# Altium PCB ElectrodesEMG.PcbDoc
Units mil, origin at the board's own origin, x right, y up, seen from the top; angles counter-clockwise.
Board outline 2999.03 x 3030.03 mil, 2 copper layers (Top Layer, Bottom Layer); 3 components, 0 nets, 278 pads, 132 vias.
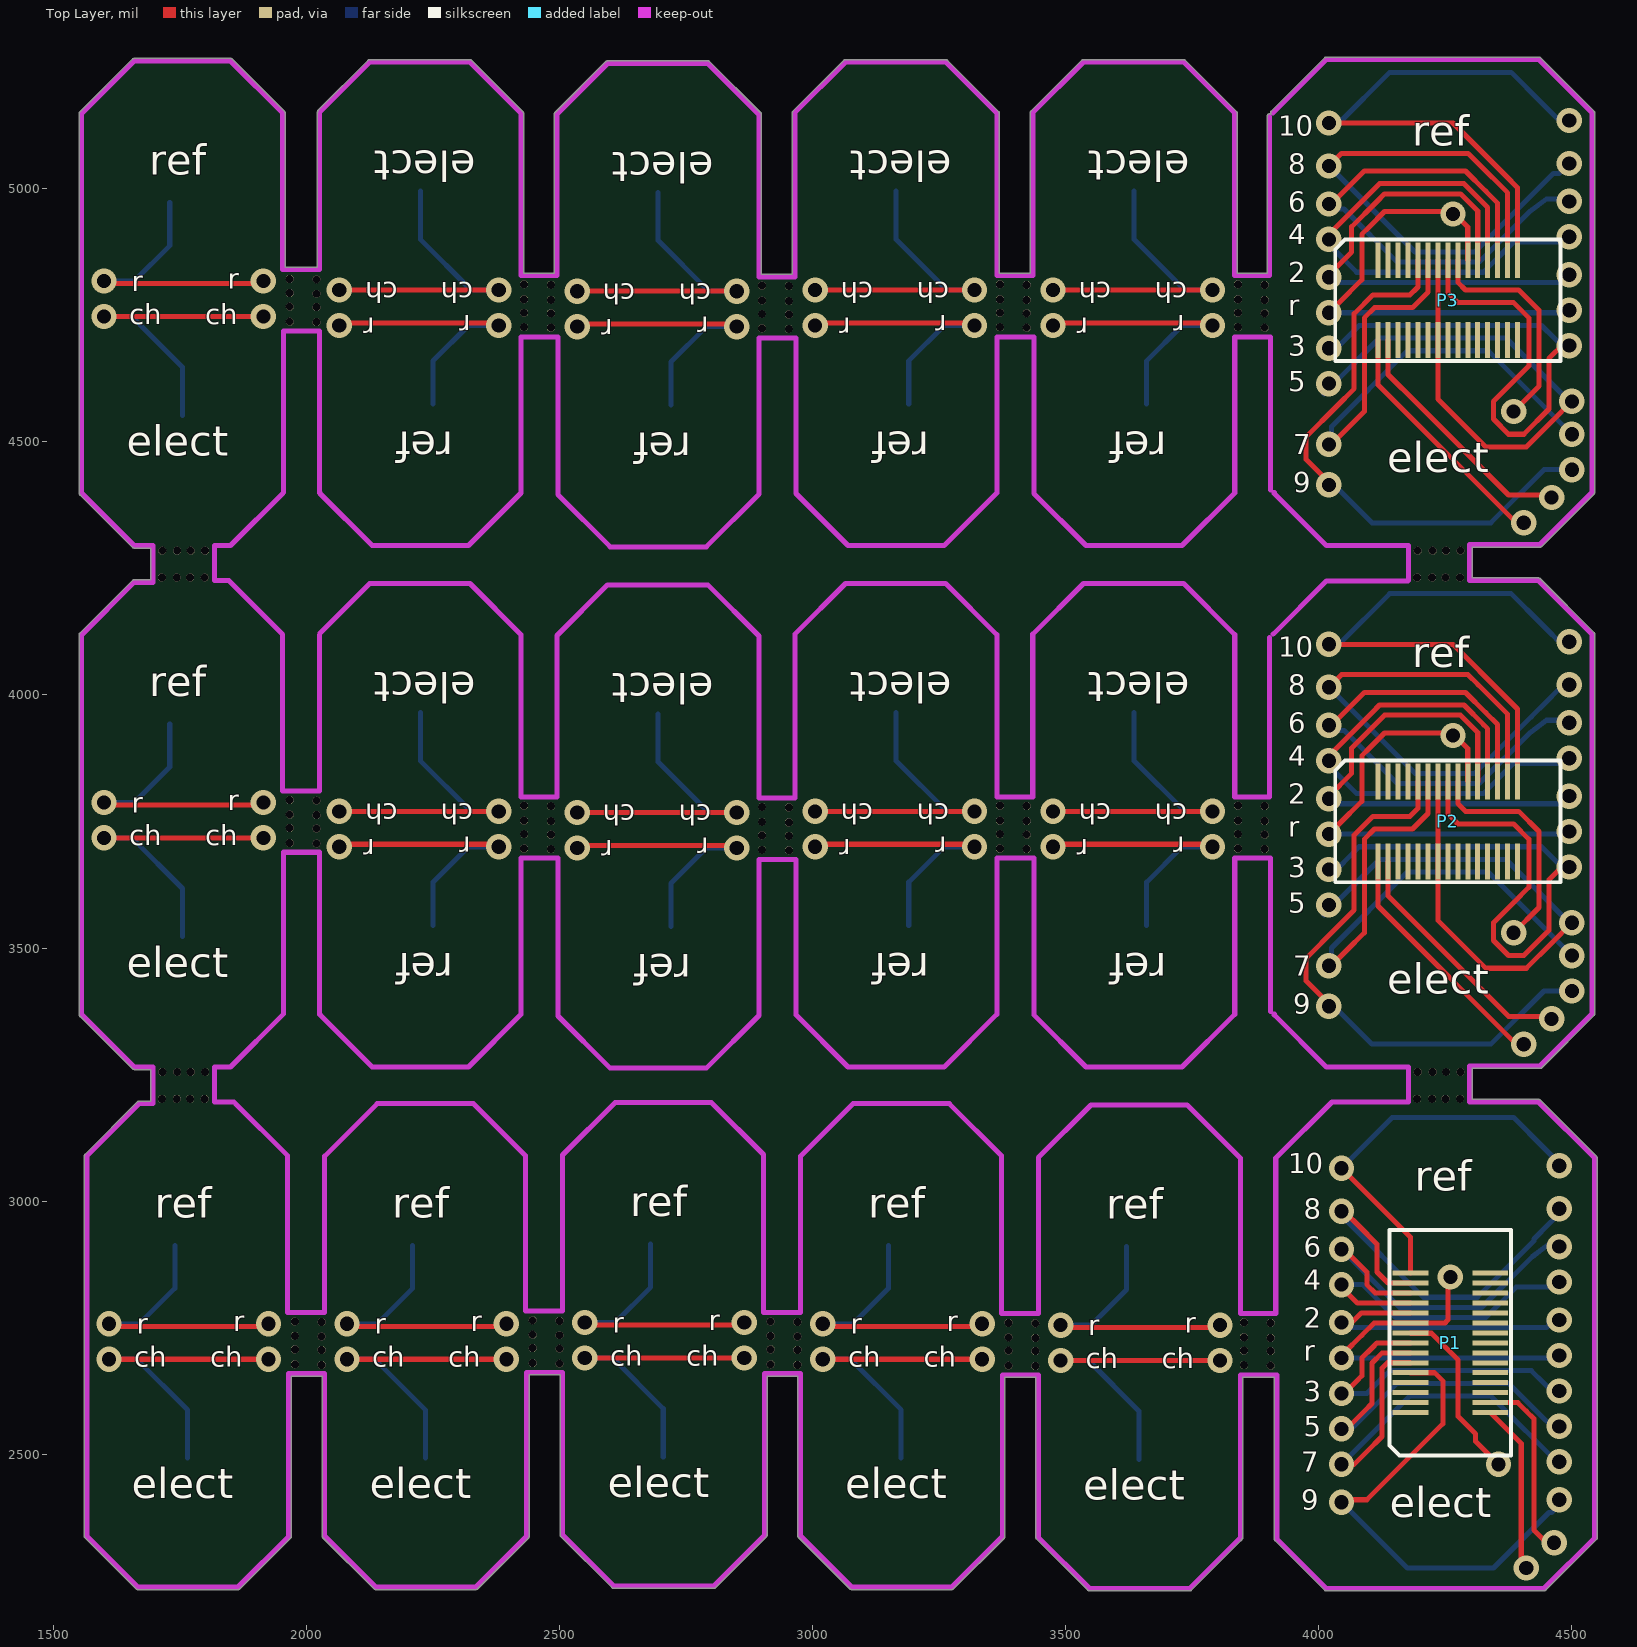
[diagram p0: Top Layer view]
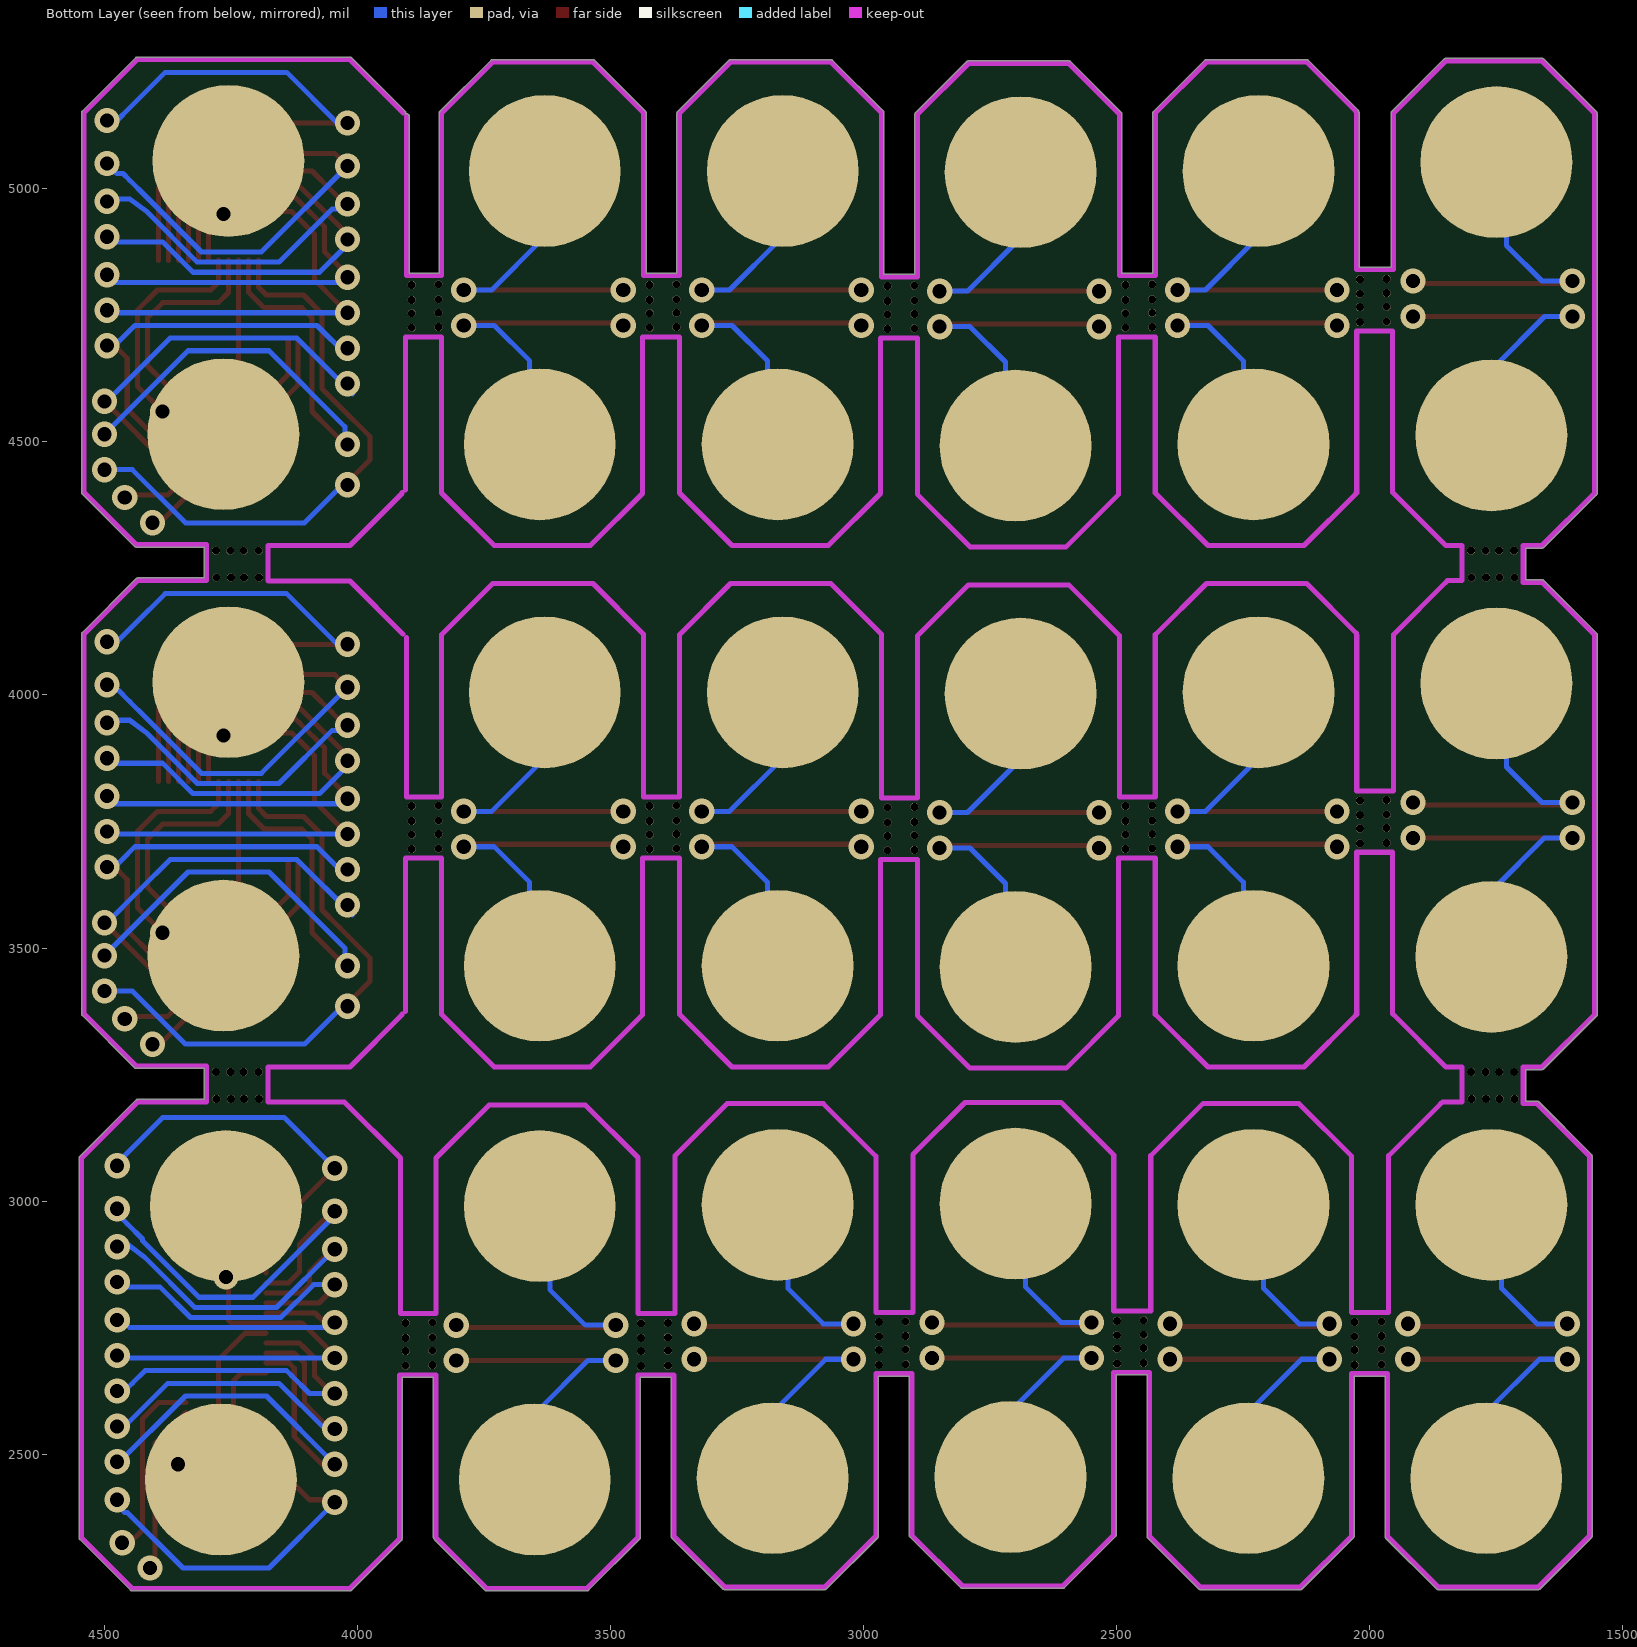
[diagram p1: Bottom Layer view, seen from below]

## Layer stack, top to bottom
Top Solder: solder mask 0.4, Solder Resist, Dk 3.5
Top Layer: signal copper 1.4
Dielectric 1: dielectric 12.6, FR-4, Dk 4.8
Bottom Layer: signal copper 1.4
Bottom Solder: solder mask 0.4, Solder Resist, Dk 3.5

## Board outline
1667,2232.56 1865,2232.56 ccw(c1865,2237.57) 1868.56,2234.05 1868.55,2234.03 1968.55,2334.03 ccw(c1965,2337.57) 1970.02,2337.57 ccw(c1965,2337.57) 1969.91,2338.57 ccw(c1965,2339.57) 1970.02,2339.57 1970.02,2654.13 2030.98,2654.13 2030.98,2338.57 ccw(c2036,2338.57) 2032.47,2335.01 2032.45,2335.03 2133.45,2234.03 2133.44,2234.05 ccw(c2137,2237.57) 2137,2232.56 2335,2232.56 ccw(c2335,2237.57) 2338.56,2234.05 2338.55,2234.03 2438.55,2334.03 ccw(c2435,2337.57) 2440.01,2337.57 ccw(c2435,2337.57) 2439.91,2338.57 ccw(c2435,2339.57) 2440.01,2339.57 2440.01,2656.56 2500.99,2656.56 2500.99,2341 ccw(c2506,2341) 2502.47,2337.44 2502.45,2337.45 2603.45,2236.45 2603.44,2236.47 ccw(c2607,2240) 2607,2234.99 2805,2234.99 ccw(c2805,2240) 2808.56,2236.47 2808.55,2236.45 2908.55,2336.45 ccw(c2905,2340) 2910.01,2340 ccw(c2905,2340) 2909.91,2341 ccw(c2905,2342) 2910.01,2342 2910.01,2654.13 2970.99,2654.13 2970.99,2338.57 ccw(c2976,2338.57) 2972.47,2335.01 2972.45,2335.03 3073.45,2234.03 3073.44,2234.05 ccw(c3077,2237.57) 3077,2232.56 3275,2232.56 ccw(c3275,2237.57) 3278.56,2234.05 3278.55,2234.03 3378.55,2334.03 ccw(c3375,2337.57) 3380.01,2337.57 ccw(c3375,2337.57) 3379.91,2338.57 ccw(c3375,2339.57) 3380.01,2339.57 3380.01,2651.56 3440.99,2651.56 3440.99,2336 ccw(c3446,2336) 3442.47,2332.44 3442.45,2332.45 3543.45,2231.45 3543.44,2231.47 ccw(c3547,2235) 3547,2229.99 3745,2229.99 ccw(c3745,2235) 3748.56,2231.47 3748.55,2231.45 3846.55,2329.45 ccw(c3843,2333) 3847.89,2331.9 ccw(c3845,2336) 3850.01,2336 3850.01,2651.84 3911.99,2651.84 3911.99,2333 ccw(c3917,2333) 3913.47,2329.44 3913.45,2329.45 4011.45,2231.45 4011.44,2231.47 ccw(c4015,2235) 4015,2229.99 4445,2229.99 ccw(c4445,2235) 4448.56,2231.47 4448.55,2231.45 4548.55,2331.45 4548.53,2331.44 ccw(c4545,2335) 4550.02,2335 4550.02,3085 ccw(c4545,3085) 4548.53,3088.56 4548.55,3088.55 4437.55,3199.55 4437.56,3199.53 ccw(c4434,3196) 4434,3201.01 4303.02,3201.01 4303.02,3261.99 4437,3261.99 ccw(c4437,3267) 4440.56,3263.47 4440.55,3263.45 4543.55,3366.45 4543.53,3366.44 ccw(c4540,3370) 4545.02,3370 4545.02,4120 ccw(c4540,4120) 4543.53,4123.56 4543.55,4123.55 4438.55,4228.55 ccw(c4435,4225) 4438.01,4229.01 ccw(c4434,4226) 4434,4231.02 4303.02,4231.02 4303.02,4291.98 4437,4291.98 ccw(c4437,4297) 4440.56,4293.47 4440.55,4293.45 4543.55,4396.45 4543.53,4396.44 ccw(c4540,4400) 4545.02,4400 4545.02,5150 ccw(c4540,5150) 4543.53,5153.56 4543.55,5153.55 4438.55,5258.55 4438.56,5258.53 ccw(c4435,5255) 4435,5260.02 4015,5260.02 ccw(c4015,5255) 4011.44,5258.53 4011.45,5258.55 3906.45,5153.55 ccw(c3910,5150) 3905.93,5147.07 ccw(c3903,5143) 3897.99,5143 3897.99,4833.44 3839.01,4833.44 3839.01,5149 ccw(c3834,5149) 3837.53,5152.56 3837.55,5152.55 3736.55,5253.55 3736.56,5253.53 ccw(c3733,5250) 3733,5255.02 3535,5255.02 ccw(c3535,5250) 3531.44,5253.53 3531.45,5253.55 3431.45,5153.55 ccw(c3435,5150) 3430.09,5149 ccw(c3435,5148) 3429.99,5148 3429.99,4833.44 3369.01,4833.44 3369.01,5149 ccw(c3364,5149) 3367.53,5152.56 3367.55,5152.55 3266.55,5253.55 3266.56,5253.53 ccw(c3263,5250) 3263,5255.02 3065,5255.02 ccw(c3065,5250) 3061.44,5253.53 3061.45,5253.55 2961.45,5153.55 ccw(c2965,5150) 2960.09,5149 ccw(c2965,5148) 2959.99,5148 2959.99,4831.02 2899.01,4831.02 2899.01,5146.57 ccw(c2894,5146.57) 2897.53,5150.14 2897.55,5150.12 2796.55,5251.12 2796.56,5251.1 ccw(c2793,5247.57) 2793,5252.59 2595,5252.59 ccw(c2595,5247.57) 2591.44,5251.1 2591.45,5251.12 2491.45,5151.12 ccw(c2495,5147.57) 2490.09,5146.57 ccw(c2495,5145.57) 2489.99,5145.57 2489.99,4833.44 2429.01,4833.44 2429.01,5149 ccw(c2424,5149) 2427.53,5152.56 2427.55,5152.55 2326.55,5253.55 2326.56,5253.53 ccw(c2323,5250) 2323,5255.02 2125,5255.02 ccw(c2125,5250) 2121.44,5253.53 2121.45,5253.55 2023.45,5155.55 ccw(c2027,5152) 2022,5151.6 ccw(c2026,5148.57) 2020.98,5148.57 2020.98,4845.16 1958.02,4845.16 1958.02,5149.57 ccw(c1953,5149.57) 1956.53,5153.14 1956.55,5153.12 1853.55,5256.12 1853.56,5256.1 ccw(c1850,5252.57) 1850,5257.59 1660,5257.59 ccw(c1660,5252.57) 1656.44,5256.1 1656.45,5256.12 1552.45,5152.12 1552.47,5152.14 ccw(c1556,5148.57) 1550.98,5148.57 1550.98,4398.57 ccw(c1556,4398.57) 1553.88,4394.03 1656.45,4291.45 1656.44,4291.47 ccw(c1660,4295) 1660,4289.98 1691.98,4289.98 1691.98,4227.59 1660,4227.59 ccw(c1660,4222.57) 1656.44,4226.1 1656.45,4226.12 1552.45,4122.12 1552.47,4122.14 ccw(c1556,4118.57) 1550.98,4118.57 1550.98,3368.57 ccw(c1556,3368.57) 1553.88,3364.03 1656.45,3261.45 1656.44,3261.47 ccw(c1660,3265) 1660,3259.99 1691.98,3259.99 1691.98,3197.59 1670,3197.59 ccw(c1670,3192.57) 1666.44,3196.1 1666.45,3196.12 1562.45,3092.12 1562.47,3092.14 ccw(c1566,3088.57) 1560.98,3088.57 1560.98,2338.57 ccw(c1566,2338.57) 1562.47,2335.01 1562.45,2335.03 1663.45,2234.03 1663.44,2234.05 ccw(c1667,2237.57)

## Design rules (kind name [scope] priority, off if disabled: settings)
Clearance [All] p1: gap=6
PolygonConnect [All] p1: connectstyle=Relief reliefconductorwidth=10 reliefentries=4 polygonreliefangle="90 Angle" airgapwidth=10
RoutingVias [All] p1: holewidth=28 width=50 viastyle="Through Hole" minholewidth=28 minwidth=50 maxholewidth=28 maxwidth=50
SolderMaskExpansion [All] p1: expansion=4
Width [All] p1: maxlimit=19685.04 minlimit=10 preferedwidth=10
30 further rules are at their usual default settings.

## Components (designator, comment, footprint, x,y, rotation, side; value= is the part's Value field where it differs from the comment)
P1 "Molex 529910308" "Molex 0529910308" 4260,2720 r90 top
P2 "Molex 529910308" "Molex 0529910308" 4255,3750 r0 top (schematic designator P1)
P3 "Molex 529910308" "Molex 0529910308" 4255,4780 r0 top (schematic designator P1)

## Footprints (in the part's own frame and the unit in brackets; to place one, negate y for a bottom-side part, rotate by r counter-clockwise, add the part's x,y. Pads: shape width x height; smd on the part's side, far side on the other; paste and mask are expansions set on the pad)
"Molex 0529910308" [mm]
  rect 0.25x1.8 smd: 1(-3.5,2) 2(-3.5,-2) 3(-3,2) 4(-3,-2) 5(-2.5,2) 6(-2.5,-2) 7(-2,2) 8(-2,-2) 9(-1.5,2) 10(-1.5,-2) 11(-1,2) 12(-1,-2) 13(-0.5,2) 14(-0.5,-2) 15(0,2) 16(0,-2) 17(0.5,2) 18(0.5,-2) 19(1,2) 20(1,-2) 21(1.5,2) 22(1.5,-2) 23(2,2) 24(2,-2) 25(2.5,2) 26(2.5,-2) 27(3,2) 28(3,-2) 29(3.5,2) 30(3.5,-2)
  silkscreen extent -5.65,-3.05 5.65,3.05, body extent -5.65,-2.7 5.65,2.7, height 2.33

## Free pads (board coordinates)
  round 15.75 hole 15.75 unplated: 2(1714.28,3202) 2(1714.28,4232) 2(1715.28,3255) 2(1715.28,4285) 2(1743.85,3202) 2(1743.85,4232) 2(1744.85,3255) 2(1744.85,4285) 2(1770.43,3202) 2(1770.43,4232) 2(1771.43,3255) 2(1771.43,4285) 2(1799,3202) 2(1799,4232) 2(1800,3255) 2(1800,4285) 2(1967,3707.43) 2(1967,3737) 2(1967,3763.57) 2(1967,3792.15) 2(1967,4737.43) 2(1967,4767) 2(1967,4793.57) 2(1967,4822.15) 2(1977,2677.43) 2(1977,2707) 2(1977,2733.57) 2(1977,2762.15) 2(2020,3706.43) 2(2020,3736) 2(2020,3762.57) 2(2020,3791.15) 2(2020,4736.43) 2(2020,4766) 2(2020,4792.57) 2(2020,4821.15) 2(2030,2676.43) 2(2030,2706) 2(2030,2732.57) 2(2030,2761.15) 2(2430,3696.43) 2(2430,3725) 2(2430,3751.57) 2(2430,3781.15) 2(2430,4726.43) 2(2430,4755) 2(2430,4781.57) 2(2430,4811.15) 2(2447,2679.85) 2(2447,2709.43) 2(2447,2736) 2(2447,2764.57) 2(2483,3695.43) 2(2483,3724) 2(2483,3750.57) 2(2483,3780.15) 2(2483,4725.43) 2(2483,4754) 2(2483,4780.57) 2(2483,4810.15) 2(2500,2678.85) 2(2500,2708.43) 2(2500,2735) 2(2500,2763.57) 2(2900,3694) 2(2900,3722.57) 2(2900,3749.15) 2(2900,3778.72) 2(2900,4724) 2(2900,4752.57) 2(2900,4779.15) 2(2900,4808.72) 2(2917,2677.43) 2(2917,2707) 2(2917,2733.57) 2(2917,2762.15) 2(2953,3693) 2(2953,3721.57) 2(2953,3748.15) 2(2953,3777.72) 2(2953,4723) 2(2953,4751.57) 2(2953,4778.15) 2(2953,4807.72) 2(2970,2676.43) 2(2970,2706) 2(2970,2732.57) 2(2970,2761.15) 2(3370,3696.43) 2(3370,3725) 2(3370,3751.57) 2(3370,3781.15) 2(3370,4726.43) 2(3370,4755) 2(3370,4781.57) 2(3370,4811.15) 2(3387,2674.85) 2(3387,2704.43) 2(3387,2731) 2(3387,2759.57) 2(3423,3695.43) 2(3423,3724) 2(3423,3750.57) 2(3423,3780.15) 2(3423,4725.43) 2(3423,4754) 2(3423,4780.57) 2(3423,4810.15) 2(3440,2673.85) 2(3440,2703.43) 2(3440,2730) 2(3440,2758.57) 2(3840,3696.43) 2(3840,3725) 2(3840,3751.57) 2(3840,3781.15) 2(3840,4726.43) 2(3840,4755) 2(3840,4781.57) 2(3840,4811.15) 2(3852,2675.85) 2(3852,2704.43) 2(3852,2731) 2(3852,2760.57) 2(3893,3695.43) 2(3893,3724) 2(3893,3750.57) 2(3893,3780.15) 2(3893,4725.43) 2(3893,4754) 2(3893,4780.57) 2(3893,4810.15) 2(3905,2674.85) 2(3905,2703.43) 2(3905,2730) 2(3905,2759.57) 2(4194.28,3202) 2(4194.28,4232) 2(4195.28,3255) 2(4195.28,4285) 2(4223.85,3202) 2(4223.85,4232) 2(4224.85,3255) 2(4224.85,4285) 2(4250.43,3202) 2(4250.43,4232) 2(4251.43,3255) 2(4251.43,4285) 2(4279,3202) 2(4279,4232) 2(4280,3255) 2(4280,4285)
  round 300 smd far side: 3(1750,4022.57) 3(1750,5052.57) 3(1760,2992.57) 3(1760,3482.57) 3(1760,4512.57) 3(1770,2452.57) 3(2220,4005) 3(2220,5035) 3(2230,2992.57) 3(2230,3465) 3(2230,4495) 3(2240,2452.57) 3(2690,4002.57) 3(2690,5032.57) 3(2700,2995) 3(2700,3462.57) 3(2700,4492.57) 3(2710,2455) 3(3160,4005) 3(3160,5035) 3(3170,2992.57) 3(3170,3465) 3(3170,4495) 3(3180,2452.57) 3(3630,4005) 3(3630,5035) 3(3640,2990) 3(3640,3465) 3(3640,4495) 3(3650,2450) 3(4255,4025) 3(4255,5055) 3(4260,2990) 3(4265,3485) 3(4265,4515) 3(4270,2450)

## Via types
v1: diameter 50, hole 28, Top Layer to Bottom Layer, 132 vias

## Nets (pads, with @x,y where several pads share a name; then routed paths per layer and width w, separated by ;. In a path a pad name is that pad's centre, name@x,y a point inside that pad or via, vN(x,y) a via of type N, cw(c..) or ccw(c..) an arc to the next point about the centre after c; other vN are vias at no path point)
pads on no net: P1.1 P1.2 P1.3 P1.4 P1.5 P1.6 P1.7 P1.8 P1.9 P1.10 P1.11 P1.12 P1.13 P1.14 P1.15 P1.16 P1.17 P1.18 P1.19 P1.20 P1.21 P1.22 P1.23 P1.24 P1.25 P1.26 P1.27 P1.28 P1.29 P1.30 P2.1 P2.2 P2.3 P2.4 P2.5 P2.6 P2.7 P2.8 P2.9 P2.10 P2.11 P2.12 P2.13 P2.14 P2.15 P2.16 P2.17 P2.18 P2.19 P2.20 P2.21 P2.22 P2.23 P2.24 P2.25 P2.26 P2.27 P2.28 P2.29 P2.30 P3.1 P3.2 P3.3 P3.4 P3.5 P3.6 P3.7 P3.8 P3.9 P3.10 P3.11 P3.12 P3.13 P3.14 P3.15 P3.16 P3.17 P3.18 P3.19 P3.20 P3.21 P3.22 P3.23 P3.24 P3.25 P3.26 P3.27 P3.28 P3.29 P3.30
copper on no net: | length 52596.2
  Top Layer w10: v1(1600,3717.57) v1(1915,3717.57) ; v1@1600,3782.57 v1@1915,3782.57 ; v1(1600,3787.57) v1@1605,3782.57 ; v1(1600,4747.57) v1(1915,4747.57) ; v1@1600,4812.57 v1@1915,4812.57 ; v1(1600,4817.57) v1@1605,4812.57 ; v1(1610,2687.57) v1(1925,2687.57) ; v1@1610,2752.57 v1@1925,2752.57 ; v1(1610,2757.57) v1@1615,2752.57 ; v1@2065,3705 v1@2380,3705 ; v1(2065,3770) v1(2380,3770) ; v1@2065,4735 v1@2380,4735 ; v1(2065,4800) v1(2380,4800) ; v1(2080,2687.57) v1(2395,2687.57) ; v1@2080,2752.57 v1@2395,2752.57 ; v1(2080,2757.57) v1@2085,2752.57 ; v1@2375,3705 v1(2380,3700) ; v1@2375,4735 v1(2380,4730) ; v1@2535,3702.57 v1@2850,3702.57 ; v1(2535,3767.57) v1(2850,3767.57) ; v1@2535,4732.57 v1@2850,4732.57 ; v1(2535,4797.57) v1(2850,4797.57) ; v1(2550,2690) v1(2865,2690) ; v1@2550,2755 v1@2865,2755 ; v1(2550,2760) v1@2555,2755 ; v1@2845,3702.57 v1(2850,3697.57) ; v1@2845,4732.57 v1(2850,4727.57) ; v1@3005,3705 v1@3320,3705 ; v1(3005,3770) v1(3320,3770) ; v1@3005,4735 v1@3320,4735 ; v1(3005,4800) v1(3320,4800) ; v1(3020,2687.57) v1(3335,2687.57) ; v1@3020,2752.57 v1@3335,2752.57 ; v1(3020,2757.57) v1@3025,2752.57 ; v1@3315,3705 v1(3320,3700) ; v1@3315,4735 v1(3320,4730) ; v1@3475,3705 v1@3790,3705 ; v1(3475,3770) v1(3790,3770) ; v1@3475,4735 v1@3790,4735 ; v1(3475,4800) v1(3790,4800) ; v1(3490,2685) v1(3805,2685) ; v1@3490,2750 v1@3805,2750 ; v1(3490,2755) v1@3495,2750 ; v1@3785,3705 v1(3790,3700) ; v1@3785,4735 v1(3790,4730) ; v1(4020,3725) 4040,3745 4085,3790 4085,3840 4085,3880 4100,3895 4130,3925 4260,3925 v1(4265,3920) ; v1(4020,3795) 4020,3800 4065,3845 4065,3895 4115,3945 4130,3960 4280,3960 4314.06,3925.94 4314.06,3828.74 ; v1(4020,3870) 4020,3880 4105,3965 4120,3980 4250,3980 4286.72,3980 4325.86,3940.86 4333.74,3932.98 4333.74,3828.74 ; v1(4020,3940) v1@4025,3940 ; v1(4020,4015) 4045,4040 4225,4040 4295,4040 4315,4020 4373.11,3961.89 4373.11,3828.74 ; v1(4020,4100) 4265,4100 4370,3995 4392.8,3972.2 4392.8,3828.74 ; v1(4020,4755) 4040,4775 4085,4820 4085,4870 4085,4910 4100,4925 4130,4955 4260,4955 v1(4265,4950) ; v1(4020,4825) 4020,4830 4065,4875 4065,4925 4115,4975 4130,4990 4280,4990 4314.06,4955.94 4314.06,4858.74 ; v1(4020,4900) 4020,4910 4105,4995 4120,5010 4250,5010 4286.72,5010 4325.86,4970.86 4333.74,4962.98 4333.74,4858.74 ; v1(4020,4970) v1@4025,4970 ; v1(4020,5045) 4045,5070 4225,5070 4295,5070 4315,5050 4373.11,4991.89 4373.11,4858.74 ; v1(4020,5130) 4265,5130 4370,5025 4392.8,5002.2 4392.8,4858.74 ; v1@4025,3385 3975,3435 3975,3480 4035,3540 4070,3575 4070,3650 4070,3723.28 4106.72,3760 4180,3760 4195,3775 ; v1@4025,3465 4055,3495 4090,3530 4090,3650 4090,3715 4110,3735 4185,3735 4215.63,3765.63 4215.63,3828.74 ; v1@4025,4415 3975,4465 3975,4510 4035,4570 4070,4605 4070,4680 4070,4753.28 4106.72,4790 4180,4790 4195,4805 ; v1@4025,4495 4055,4525 4090,4560 4090,4680 4090,4745 4110,4765 4185,4765 4215.63,4795.63 4215.63,4858.74 ; v1@4036.64,3951.64 v1@4025,3940 ; v1@4036.64,4981.64 v1@4025,4970 ; v1@4040,2690 v1@4040,2700 ; v1@4040,2745 v1@4040,2750 ; v1@4040,2760 4065,2760 4084.06,2779.06 4181.26,2779.06 ; v1@4040,2835 4076.26,2798.74 4181.26,2798.74 4181,2799 ; v1@4045,2395 v1@4060,2410 ; v1@4050,2545 v1@4050,2555 ; v1@4050,2620 4075.78,2645.78 4085,2655 4085,2690 4105,2710 4115,2720 4130,2720 4181.26,2720 ; v1@4050,2700 4085,2735 4109.37,2759.37 4181.26,2759.37 4249.37,2759.37 4255,2765 4255,2810 4255,2830 4255,2845 v1(4260,2850) ; v1@4055,2975 4078.28,2951.72 4115,2915 4115,2860 4136.89,2838.11 4181.26,2838.11 ; v1@4055,3055 4181.26,2928.74 4181.26,2857.8 ; v1@4060,2480 4040,2480 4070,2480 4095,2505 4125,2535 4125,2670 4135.63,2680.63 4181.26,2680.63 ; v1@4060,2555 4090,2585 4105,2600 4105,2680 4125.31,2700.32 4181.26,2700.32 ; 4070,2410 4095,2410 ; 4085,2870 4050,2905 4095,2860 4095,2835 4111.57,2818.43 4181.26,2818.43 ; 4090,2410 4095,2410 ; 4117.2,3671.26 4117.2,3582.8 v1@4400,3300 ; 4117.2,4701.26 4117.2,4612.8 v1@4400,4330 ; 4136.89,3671.26 4136.89,3603.11 4195,3545 4375,3365 4420,3365 4455,3365 v1(4460,3360) ; 4136.89,4701.26 4136.89,4633.11 4195,4575 4375,4395 4420,4395 4455,4395 v1(4460,4390) ; 4181.26,2660.95 4229.06,2660.95 4245,2645 4245,2560 4095,2410 ; 4181.26,2739.69 4182.02,2738.92 4222.49,2738.92 4275,2686.41 4275,2610 4275,2575 4310,2540 4310,2525 v1@4345,2490 ; 4187.5,3767.5 4195.94,3775.95 4195.94,3828.74 ; 4187.5,4797.5 4195.94,4805.94 4195.94,4858.74 ; 4235.31,3828.74 4235.31,3744.68 4235.31,3671.26 4235.32,3554.68 4330,3460 4410,3460 4460,3510 v1(4500,3550) ; 4235.31,4858.74 4235.31,4774.69 4235.31,4701.26 4235.32,4584.68 4330,4490 4410,4490 4460,4540 v1(4500,4580) ; 4255,3828.74 4255,3765 4275,3745 4375,3745 4385,3745 4415,3715 4415,3663.28 4415,3620 4385,3590 4345,3550 4345,3515 4375,3485 4405,3485 4455,3535 4455,3635 4485,3665 v1@4495,3665 ; 4255,4858.74 4255,4795 4275,4775 4375,4775 4385,4775 4415,4745 4415,4693.28 4415,4650 4385,4620 4345,4580 4345,4545 4375,4515 4405,4515 4455,4565 4455,4665 4485,4695 v1@4495,4695 ; 4274.69,3828.74 4274.69,3785.31 4290,3770 4395,3770 4435,3730 4435,3705 4435,3670 4435,3580 v1(4385,3530) ; 4274.69,4858.74 4274.69,4815.31 4290,4800 4395,4800 4435,4760 4435,4735 4435,4700 4435,4610 v1(4385,4560) ; v1@4280.86,3909.14 4270,3920 v1(4265,3920) ; v1@4280.86,4939.14 4270,4950 v1(4265,4950) ; 4294.37,3828.74 4294.37,3894.37 4268.74,3920 v1(4265,3920) ; 4294.37,4858.74 4294.37,4924.37 4268.74,4950 v1(4265,4950) ; 4338.74,2582.2 4400,2520.94 v1@4400,2280 ; 4338.74,2601.89 4393.11,2601.89 4410,2585 4425,2570 4425,2495 4425,2350 v1@4455,2320 ; 4353.43,3828.74 4353.43,3941.57 4330,3965 4290,4005 4165,4005 4090,4005 4050.78,3965.78 v1@4025,3940 ; 4353.43,4858.74 4353.43,4971.57 4330,4995 4290,5035 4165,5035 4090,5035 4050.78,4995.78 v1@4025,4970 ; v1@4470,2695 v1@4470,2705 ; v1@4470,2750 v1@4470,2755 ; v1@4470,2765 v1@4495,2765 ; v1@4475,2400 v1@4490,2415 ; v1@4480,2550 v1@4480,2560
  Bottom Layer w10: v1@1590,3717.57 1625,3717.57 ; v1@1590,3787.57 1630,3787.57 ; v1@1590,4747.57 1625,4747.57 ; v1@1590,4817.57 1630,4817.57 ; v1@1600,2687.57 1635,2687.57 ; v1@1600,2757.57 1640,2757.57 ; v1(1600,3717.57) 1655,3717.57 1755,3617.57 1755,3522.57 ; v1(1600,3787.57) 1660,3787.57 1730,3857.57 1730,3942.57 ; v1(1600,4747.57) 1655,4747.57 1755,4647.57 1755,4552.57 ; v1(1600,4817.57) 1660,4817.57 1730,4887.57 1730,4972.57 ; v1(1610,2687.57) 1665,2687.57 1765,2587.57 1765,2492.57 ; v1(1610,2757.57) 1670,2757.57 1740,2827.57 1740,2912.57 ; v1@2070,2687.57 2105,2687.57 ; v1@2070,2757.57 2110,2757.57 ; v1(2080,2687.57) 2135,2687.57 2235,2587.57 2235,2492.57 ; v1(2080,2757.57) 2140,2757.57 2210,2827.57 2210,2912.57 ; 2225,3965 2225,3870 2325,3770 v1(2380,3770) ; 2225,4995 2225,4900 2325,4800 v1(2380,4800) ; 2250,3545 2250,3630 2320,3700 v1(2380,3700) ; 2250,4575 2250,4660 2320,4730 v1(2380,4730) ; 2350,3700 v1@2390,3700 ; 2350,4730 v1@2390,4730 ; v1@2355,3770 v1@2390,3770 ; v1@2355,4800 v1@2390,4800 ; v1@2540,2690 2575,2690 ; v1@2540,2760 2580,2760 ; v1(2550,2690) 2605,2690 2705,2590 2705,2495 ; v1(2550,2760) 2610,2760 2680,2830 2680,2915 ; 2695,3962.57 2695,3867.57 2795,3767.57 v1(2850,3767.57) ; 2695,4992.57 2695,4897.57 2795,4797.57 v1(2850,4797.57) ; 2720,3542.57 2720,3627.57 2790,3697.57 v1(2850,3697.57) ; 2720,4572.57 2720,4657.57 2790,4727.57 v1(2850,4727.57) ; 2820,3697.57 v1@2860,3697.57 ; 2820,4727.57 v1@2860,4727.57 ; v1@2825,3767.57 v1@2860,3767.57 ; v1@2825,4797.57 v1@2860,4797.57 ; v1@3010,2687.57 3045,2687.57 ; v1@3010,2757.57 3050,2757.57 ; v1(3020,2687.57) 3075,2687.57 3175,2587.57 3175,2492.57 ; v1(3020,2757.57) 3080,2757.57 3150,2827.57 3150,2912.57 ; 3165,3965 3165,3870 3265,3770 v1(3320,3770) ; 3165,4995 3165,4900 3265,4800 v1(3320,4800) ; 3190,3545 3190,3630 3260,3700 v1(3320,3700) ; 3190,4575 3190,4660 3260,4730 v1(3320,4730) ; 3290,3700 v1@3330,3700 ; 3290,4730 v1@3330,4730 ; v1@3295,3770 v1@3330,3770 ; v1@3295,4800 v1@3330,4800 ; v1@3480,2685 3515,2685 ; v1@3480,2755 3520,2755 ; v1(3490,2685) 3545,2685 3645,2585 3645,2490 ; v1(3490,2755) 3550,2755 3620,2825 3620,2910 ; 3635,3965 3635,3870 3735,3770 v1(3790,3770) ; 3635,4995 3635,4900 3735,4800 v1(3790,4800) ; 3660,3545 3660,3630 3730,3700 v1(3790,3700) ; 3660,4575 3660,4660 3730,4730 v1(3790,4730) ; 3760,3700 v1@3800,3700 ; 3760,4730 v1@3800,4730 ; v1@3765,3770 v1@3800,3770 ; v1@3765,4800 v1@3800,4800 ; v1@4010,3565 4120,3675 4150,3675 4350,3675 4370,3675 4430,3615 v1@4497.5,3547.5 ; v1@4010,4595 4120,4705 4150,4705 4350,4705 4370,4705 4430,4645 v1@4497.5,4577.5 ; v1@4015,3930 4050,3930 4155,3825 4316.63,3825 4416.63,3925 4450,3950 v1@4480,3950 ; v1@4015,4960 4050,4960 4155,4855 4316.63,4855 4416.63,4955 4450,4980 v1@4480,4980 ; v1@4020,3640 4080,3700 4135,3700 4285,3700 4440,3700 4465,3675 v1@4485,3655 ; v1(4020,3725) 4410,3725 v1@4495,3725 ; v1(4020,3795) 4030,3785 4445,3785 4480,3785 v1(4495,3800) ; v1@4020,3860 4075,3805 4155,3805 ; v1@4020,4006.65 v1(4020,4015) 4190,3845 4201.65,3845 4215,3845 4280,3845 4308.35,3845 4420,3956.65 4450,3986.65 4473.35,4010 4485,4010 v1(4495,4020) ; v1@4020,4670 4080,4730 4135,4730 4285,4730 4440,4730 4465,4705 v1@4485,4685 ; v1(4020,4755) 4410,4755 v1@4495,4755 ; v1(4020,4825) 4030,4815 4445,4815 4480,4815 v1(4495,4830) ; v1@4020,4890 4075,4835 4155,4835 ; v1@4020,5036.65 v1(4020,5045) 4190,4875 4201.65,4875 4215,4875 4280,4875 4308.35,4875 4420,4986.65 4450,5016.65 4463.35,5030 4475,5030 v1(4495,5050) ; v1@4025,3465 4025,3500 4175,3650 4335,3650 v1(4500,3485) ; v1@4025,4495 4025,4530 4175,4680 4335,4680 v1(4500,4515) ; v1@4027.5,3387.5 4105,3310 4310,3310 4340,3310 4445,3415 4450,3415 v1(4500,3415) ; v1@4027.5,4417.5 4105,4340 4310,4340 4340,4340 4445,4445 4450,4445 v1(4500,4445) ; v1@4040,4100 4140,4200 4300,4200 4380,4200 4440,4140 v1@4485,4095 ; v1@4040,5130 4140,5230 4300,5230 4380,5230 4440,5170 v1@4485,5125 ; v1(4045,2405) 4175,2275 4315,2275 4345,2275 4455,2385 4460,2385 v1@4475,2400 ; v1(4045,2480) 4180,2615 4340,2615 v1@4480,2475 ; v1(4045,2550) 4065,2550 4155,2640 4355,2640 4375,2640 4435,2580 4465,2550 v1@4470,2550 ; v1(4045,2620) 4095,2620 4130,2655 4140,2665 4290,2665 4420,2665 4445,2640 v1@4465,2620 ; v1(4045,2690) 4415,2690 4470,2690 v1(4475,2695) ; v1(4045,2760) 4055,2750 4450,2750 4455,2755 4455,2765 v1@4465,2755 ; v1(4045,2835) 4086.72,2835 4151.72,2770 4329.91,2770 4389.91,2830 4425,2830 4455,2830 v1@4490,2830 ; v1(4045,2905) 4160,2790 4321.63,2790 4421.63,2890 4455,2915 v1@4485,2915 ; v1(4045,2980) 4045,2971.65 4206.65,2810 4220,2810 4285,2810 4313.35,2810 4425,2921.65 4425,2925 4455,2955 v1@4465,2965 ; v1(4045,3065) 4145,3165 4305,3165 4385,3165 4445,3105 v1@4490,3060 ; 4146.72,3805 4324.91,3805 4384.91,3865 4420,3865 4450,3865 v1@4485,3865 ; 4146.72,4835 4324.91,4835 4384.91,4895 4420,4895 4450,4895 v1@4485,4895 ; 4470,3950 4490,3950 v1(4495,3945) ; 4470,4110 4490,4110 v1(4495,4105) ; 4470,4980 4490,4980 v1(4495,4975) ; 4470,5140 4490,5140 v1(4495,5135) ; v1@4485,3865 v1(4495,3875) v1@4485,3865 ; v1@4485,3865 4470,3865 v1@4485,3865 ; v1@4485,4895 4470,4895 v1@4485,4895 ; v1@4485,4895 v1(4495,4905) v1@4485,4895
  other v1: 4410,2275 4465,2325 4475,2410 4355,2480 4475,2485 4475,2555 4475,2625 3805,2755 1925,2757.57 2395,2757.57 3335,2757.57 2865,2760 4475,2765 4475,2840 4475,2910 4475,2985 4475,3070 4405,3310 4020,3385 4020,3465 4020,3585 4020,3655 4495,3660 2535,3697.57 2065,3700 3005,3700 3475,3700 4495,3730 1915,3787.57 4405,4340 4020,4415 4020,4495 4020,4615 4020,4685 4495,4690 2535,4727.57 2065,4730 3005,4730 3475,4730 4495,4760 1915,4817.57

## Keep-outs
Keep-Out Layer:
  lines w10: 1556,3368.57 1556,4118.57 1660,4222.57 1697,4222.57 1697,4295 1660,4295 1557,4398 ; 1556,4398.57 1556,5148.57 1660,5252.57 1850,5252.57 1953,5149.57 1953,5147.57 1953,4840.15 2026,4840.15 2026,5148.57 ; 1557,3368 1660,3265 1697,3265 1697,3192.57 1670,3192.57 1566,3088.57 1566,2338.57 1667,2237.57 1865,2237.57 1965,2337.57 ; 1856.57,3196 1818,3196 1818,3265 1820,3265 1850,3265 1954,3369 ; 1860,3192.57 1963,3089.57 1963,3087.57 1963,2780.15 2036,2780.15 2036,3088.57 2140,3192.57 2330,3192.57 2433,3089.57 2433,3087.57 2433,2782.57 2506,2782.57 2506,3091 2610,3195 2800,3195 2903,3092 2903,3090 2903,2780.15 2976,2780.15 2976,3088.57 3080,3192.57 3270,3192.57 3373,3089.57 3373,3087.57 3373,2777.57 3446,2777.57 3446,3086 3550,3190 3740,3190 3845,3085 3845,2777.57 ; 1954,4399 1850,4295 1820,4295 1818,4295 1818,4226 1846.57,4226 1850,4222.57 1953,4119.57 1953,4117.57 1953,3810.15 2026,3810.15 2026,4118.57 ; 1955,3369.57 1955,3689.15 2026,3689.15 2026,3368.57 ; 1955,4399.57 1955,4719.15 2026,4719.15 2026,4398.57 ; 1965,2339.57 1965,2659.15 2036,2659.15 2036,2338.57 2137,2237.57 2335,2237.57 2435,2337.57 ; 2027,3370 2027,3368 2130,3265 2320,3265 2424,3369 2424,3677.43 2497,3677.43 2497,3367.57 2497,3365.57 2600,3262.57 2790,3262.57 2894,3366.57 2894,3675 2967,3675 2967,3370 2967,3368 3070,3265 3260,3265 3364,3369 3364,3677.43 3437,3677.43 3437,3370 3437,3368 3540,3265 3730,3265 3834,3369 3834,3677.43 3905,3677.43 3905,3375 ; 2027,4122 2125,4220 2323,4220 2424,4119 2424,3798.43 2495,3798.43 2495,4115.57 ; 2027,4400 2027,4398 2130,4295 2320,4295 2424,4399 2424,4707.43 2497,4707.43 2497,4397.57 2497,4395.57 2600,4292.57 2790,4292.57 2894,4396.57 2894,4705 2967,4705 2967,4400 2967,4398 3070,4295 3260,4295 3364,4399 3364,4707.43 3437,4707.43 3437,4400 3437,4398 3540,4295 3730,4295 3834,4399 3834,4707.43 3905,4707.43 3905,4405 ; 2027,5152 2125,5250 2323,5250 2424,5149 2424,4828.43 2495,4828.43 2495,5145.57 ; 2435,2339.57 2435,2661.57 2506,2661.57 2506,2341 2607,2240 2805,2240 2905,2340 ; 2495,4117.57 2595,4217.57 2793,4217.57 2894,4116.57 2894,3796 2965,3796 2965,4118 ; 2495,5147.57 2595,5247.57 2793,5247.57 2894,5146.57 2894,4826 2965,4826 2965,5148 ; 2905,2342 2905,2659.15 2976,2659.15 2976,2338.57 3077,2237.57 3275,2237.57 3375,2337.57 ; 2965,4120 3065,4220 3263,4220 3364,4119 3364,3798.43 3435,3798.43 3435,4118 ; 2965,5150 3065,5250 3263,5250 3364,5149 3364,4828.43 3435,4828.43 3435,5148 ; 3375,2339.57 3375,2656.57 3446,2656.57 3446,2336 3547,2235 3745,2235 3843,2333 ; 3435,4120 3535,4220 3733,4220 3834,4119 3834,3798.43 3903,3798.43 3903,4113 ; 3435,5150 3535,5250 3733,5250 3834,5149 3834,4828.43 3903,4828.43 3903,5143 ; 3845,2336 3845,2656.57 ; 3846,2656.85 3917,2656.85 3917,2334.43 3917,2333 4015,2235 4445,2235 4545,2335 4545,3085 4434,3196 4298,3196 4298,3267 4437,3267 4540,3370 4540,4120 4435,4225 ; 3846,2777.85 3915,2777.85 3915,3082.43 ; 3910,4120 4015,4225 4176,4225 4177,4226 4177,4295 4015,4295 3912,4398 3912,4399.43 ; 3910,5150 4015,5255 4435,5255 4540,5150 4540,4400 4437,4297 4298,4297 4298,4226 4434,4226 ; 3912,3369.43 3912,3368 4015,3265 4177,3265 4177,3196 4026,3196 3915,3085

## Silkscreen, mask and mechanical layers (free items; w line width, h text height)
Top Overlay:
  text "10" at 3920,5105 h40
  text "ref" at 4185,5085 h60
  text "elect" at 2335,5075 h60 r180
  text "elect" at 3275,5075 h60 r180
  text "elect" at 3745,5075 h60 r180
  text "elect" at 2805,5072.57 h60 r180
  text "8" at 3940,5030 h40
  text "ref" at 1690,5027.57 h60
  text "6" at 3940,4955 h40
  text "4" at 3940,4890 h40
  text "ch" at 2180,4815 h40 r180
  text "ch" at 2330,4815 h40 r180
  text "ch" at 3120,4815 h40 r180
  text "ch" at 3270,4815 h40 r180
  text "ch" at 3590,4815 h40 r180
  text "ch" at 3740,4815 h40 r180
  text "2" at 3940,4815 h40
  text "ch" at 2650,4812.57 h40 r180
  text "ch" at 2800,4812.57 h40 r180
  text "r" at 1845,4802.57 h40
  text "r" at 1655,4797.57 h40
  text "r" at 2325,4750 h40 r180
  text "r" at 3265,4750 h40 r180
  text "r" at 3735,4750 h40 r180
  text "r" at 3940,4750 h40
  text "r" at 2795,4747.57 h40 r180
  text "r" at 2135,4745 h40 r180
  text "r" at 3075,4745 h40 r180
  text "r" at 3545,4745 h40 r180
  text "r" at 2605,4742.57 h40 r180
  text "ch" at 1650,4732.57 h40
  text "ch" at 1800,4732.57 h40
  text "3" at 3940,4670 h40
  text "5" at 3940,4600 h40
  text "ref" at 2290,4520 h60 r180
  text "ref" at 3230,4520 h60 r180
  text "ref" at 3700,4520 h60 r180
  text "ref" at 2760,4517.57 h60 r180
  text "7" at 3950,4475 h40
  text "elect" at 1645,4472.57 h60
  text "elect" at 4135,4440 h60
  text "9" at 3950,4400 h40
  text "10" at 3920,4075 h40
  text "ref" at 4185,4055 h60
  text "elect" at 2335,4045 h60 r180
  text "elect" at 3275,4045 h60 r180
  text "elect" at 3745,4045 h60 r180
  text "elect" at 2805,4042.57 h60 r180
  text "8" at 3940,4000 h40
  text "ref" at 1690,3997.57 h60
  text "6" at 3940,3925 h40
  text "4" at 3940,3860 h40
  text "ch" at 2180,3785 h40 r180
  text "ch" at 2330,3785 h40 r180
  text "ch" at 3120,3785 h40 r180
  text "ch" at 3270,3785 h40 r180
  text "ch" at 3590,3785 h40 r180
  text "ch" at 3740,3785 h40 r180
  text "2" at 3940,3785 h40
  text "ch" at 2650,3782.57 h40 r180
  text "ch" at 2800,3782.57 h40 r180
  text "r" at 1845,3772.57 h40
  text "r" at 1655,3767.57 h40
  text "r" at 2325,3720 h40 r180
  text "r" at 3265,3720 h40 r180
  text "r" at 3735,3720 h40 r180
  text "r" at 3940,3720 h40
  text "r" at 2795,3717.57 h40 r180
  text "r" at 2135,3715 h40 r180
  text "r" at 3075,3715 h40 r180
  text "r" at 3545,3715 h40 r180
  text "r" at 2605,3712.57 h40 r180
  text "ch" at 1650,3702.57 h40
  text "ch" at 1800,3702.57 h40
  text "3" at 3940,3640 h40
  text "5" at 3940,3570 h40
  text "ref" at 2290,3490 h60 r180
  text "ref" at 3230,3490 h60 r180
  text "ref" at 3700,3490 h60 r180
  text "ref" at 2760,3487.57 h60 r180
  text "7" at 3950,3445 h40
  text "elect" at 1645,3442.57 h60
  text "elect" at 4135,3410 h60
  text "9" at 3950,3370 h40
  text "10" at 3940,3055 h40
  text "ref" at 4190,3020 h60
  text "ref" at 2640,2970 h60
  text "ref" at 1700,2967.57 h60
  text "ref" at 2170,2967.57 h60
  text "ref" at 3110,2967.57 h60
  text "ref" at 3580,2965 h60
  text "8" at 3970,2965 h40
  text "6" at 3970,2890 h40
  text "4" at 3970,2825 h40
  text "2" at 3970,2750 h40
  text "r" at 2795,2745 h40
  text "r" at 1855,2742.57 h40
  text "r" at 2325,2742.57 h40
  text "r" at 3265,2742.57 h40
  text "r" at 2605,2740 h40
  text "r" at 3735,2740 h40
  text "r" at 1665,2737.57 h40
  text "r" at 2135,2737.57 h40
  text "r" at 3075,2737.57 h40
  text "r" at 3545,2735 h40
  text "r" at 3970,2685 h40
  text "ch" at 2600,2675 h40
  text "ch" at 2750,2675 h40
  text "ch" at 1660,2672.57 h40
  text "ch" at 1810,2672.57 h40
  text "ch" at 2130,2672.57 h40
  text "ch" at 2280,2672.57 h40
  text "ch" at 3070,2672.57 h40
  text "ch" at 3220,2672.57 h40
  text "ch" at 3540,2670 h40
  text "ch" at 3690,2670 h40
  text "3" at 3970,2605 h40
  text "5" at 3970,2535 h40
  text "7" at 3965,2465 h40
  text "elect" at 2595,2415 h60
  text "elect" at 1655,2412.57 h60
  text "elect" at 2125,2412.57 h60
  text "elect" at 3065,2412.57 h60
  text "elect" at 3535,2410 h60
  text "9" at 3965,2390 h40
  text "elect" at 4140,2375 h60